# EAGLE board Board (EAGLE 9.0.0)
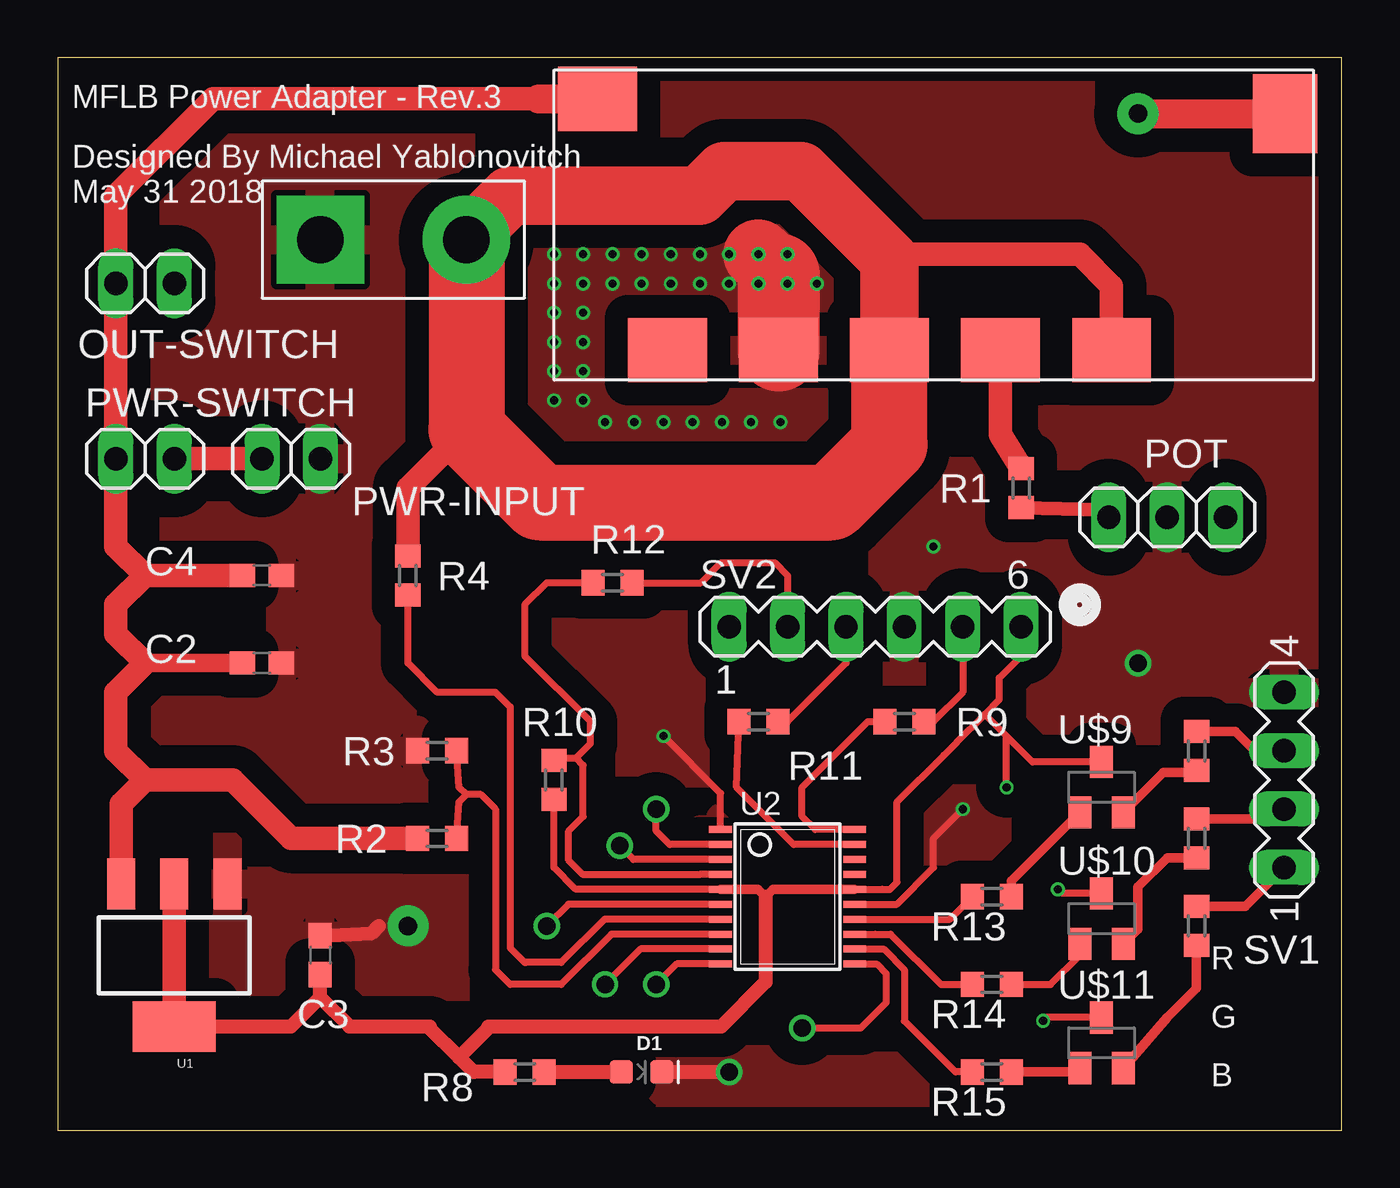
[diagram p0: board, top side]
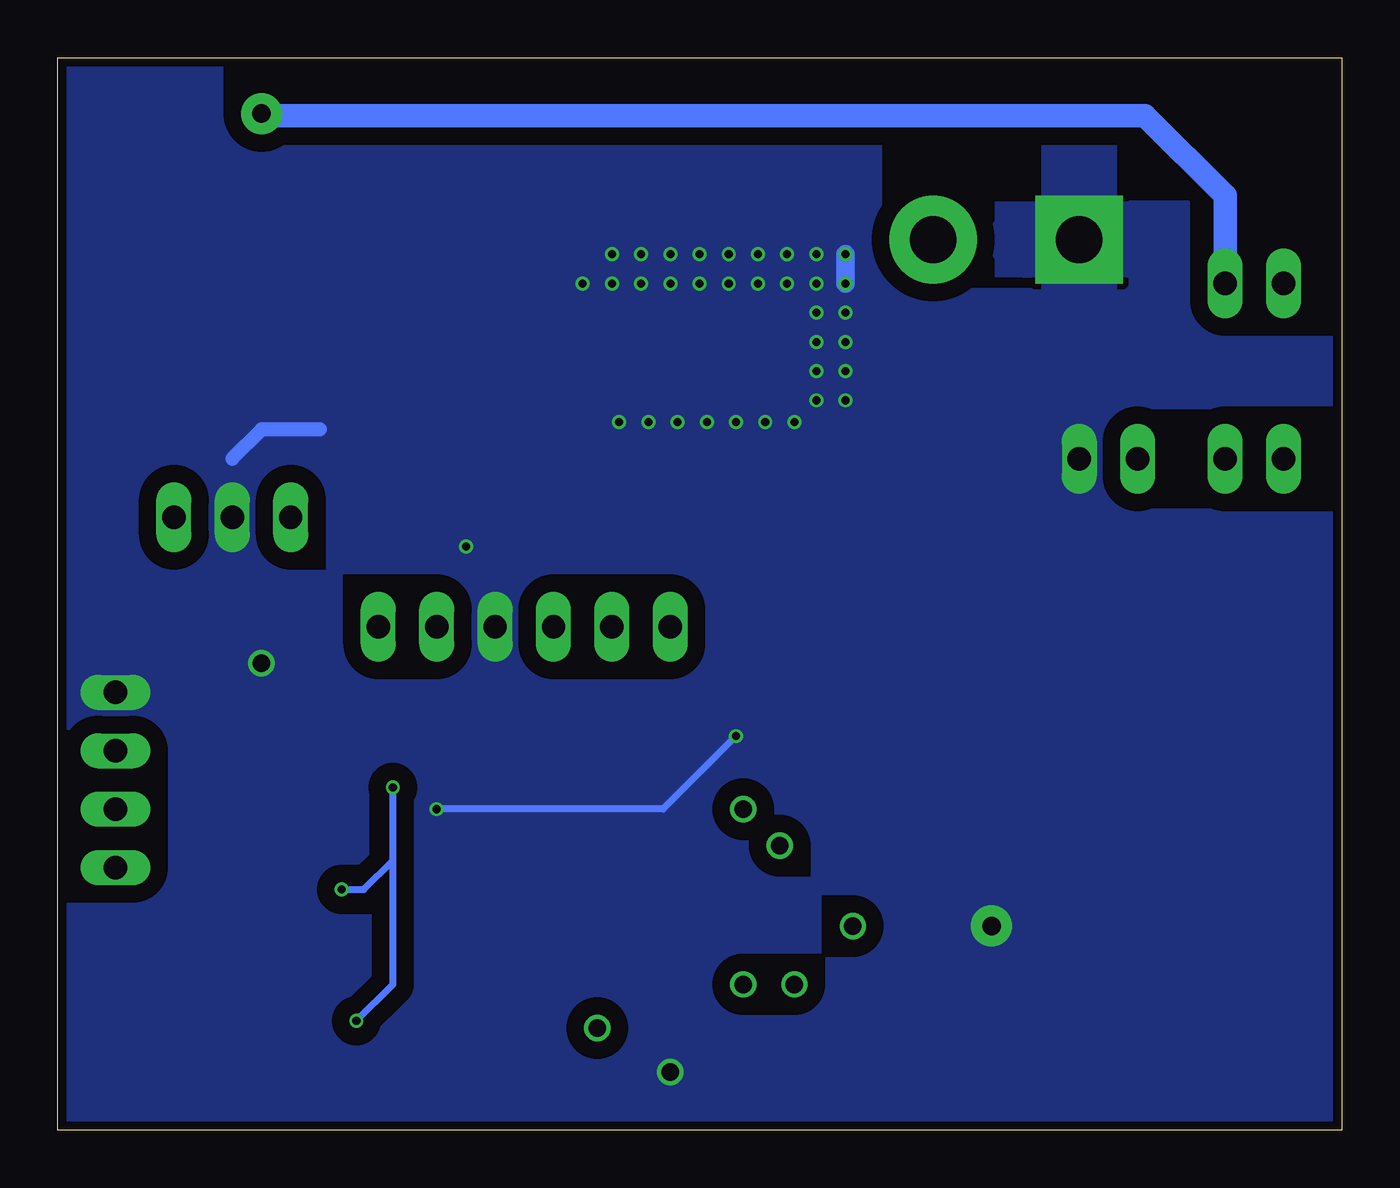
[diagram p1: board, bottom side, seen from below]

Size 55.86 x 46.66 mm. Coordinates in mm from the lower left corner, seen from the top.
Outline: 0,0 55.86,0 55.86,46.66 0,46.66 0,0
Copper layers (1*16): Top 0.035559375mm / dielectric 1.6mm / Bottom 0.035559375mm
Design rules "oshpark-2layer": minimum track width 6mil, minimum drill 10mil, track to track 6mil, track to pad 6mil, pad to pad 6mil, via to via 6mil, smd to smd 6mil, copper to edge 15mil, drill to drill 6mil, minimum pad ring 5mil, minimum via ring 5mil, stop-mask expansion 2.5mil, vias tented up to drill 0mil, thermal gap 10mil
Net classes: 0 default: width 0.254 mm, drill 0.254 mm, clearance 0.762 mm

## Footprints (pad centres in the part's own frame; a part is rotated, then mirrored left to right if it is on the bottom)
C0603 = smd 1.1 x 1: 1 -0.85,0; 2 0.85,0
LED-0603 = smd 1 x 1: A -0.877,0; C 0.877,0
OKY-T/16-D12N-C = smd 2.79 x 3.43: PIN1 15.28,4.85 | smd 3.43 x 2.79: PIN2 -14.62,5.49; PIN3 -11.57,-5.44; PIN4 -6.74,-5.44; PIN5 -1.92,-5.44; PIN6 2.91,-5.44; PIN7 7.74,-5.44
1X02 = drill 1.016 long: 1 -1.27,0; 2 1.27,0
1X03 = drill 1.016 long: 1 -2.54,0; 2 0,0; 3 2.54,0
POWER = drill 2.032 pad 3.81 square: GND 2.54,0 | drill 2.032 pad 3.81: VOUT -3.81,0
R0603 = smd 1 x 1.1: 1 -0.85,0; 2 0.85,0
MA04-1 = drill 1.016 long: 1 -3.81,0; 2 -1.27,0; 3 1.27,0; 4 3.81,0
MA06-1 = drill 1.016 long: 1 -6.35,0; 2 -3.81,0; 3 -1.27,0; 4 1.27,0; 5 3.81,0; 6 6.35,0
SOT223 = smd 1.219 x 2.235: 1 -2.311,-3.099; 2 0,-3.099; 3 2.311,-3.099 | smd 3.6 x 2.2: 4 0,3.099
TSSOP20 = smd 0.305 x 0.991: 1 -2.925,-2.918; 2 -2.275,-2.918; 3 -1.625,-2.918; 4 -0.975,-2.918; 5 -0.325,-2.918; 6 0.325,-2.918; 7 0.975,-2.918; 8 1.625,-2.918; 9 2.275,-2.918; 10 2.925,-2.918; 11 2.925,2.918; 12 2.275,2.918; 13 1.625,2.918; 14 0.975,2.918; 15 0.325,2.918; 16 -0.325,2.918; 17 -0.975,2.918; 18 -1.625,2.918; 19 -2.275,2.918; 20 -2.925,2.918
SOT23 = smd 1 x 1.4: B -0.95,-1.1; C 0.95,-1.1; E 0,1.1

## Placement (x,y rotation side)
C2  47uF  [C0603]  8.89,20.32 0 top
C3  10uF  [C0603]  11.43,7.62 90 top
C4  22uF  [C0603]  8.89,24.13 0 top
D1  BLUE  [LED-0603]  25.4,2.54 0 top
OKY-T/16-D12N-C  OKY-T/16-D12N-C  [OKY-T/16-D12N-C]  38.1,39.37 0 top
OUT-SWITCH  [1X02]  3.81,36.83 0 top
POT  100k  [1X03]  48.26,26.67 0 top
POWER  POWER  [POWER]  13.97,38.73 180 top
PWR-INPUT  [1X02]  10.16,29.21 180 top
PWR-SWITCH  [1X02]  3.81,29.21 0 top
R1  9.1k  [R0603]  41.91,27.94 90 top
R2  7.5k  [R0603]  16.51,12.7 0 top
R3  2.5k  [R0603]  16.51,16.51 0 top
R4  1k  [R0603]  15.24,24.13 270 top
R5  250  [R0603]  49.53,16.51 90 top
R6  200  [R0603]  49.53,12.7 90 top
R7  200  [R0603]  49.53,8.89 90 top
R8  180r  [R0603]  20.32,2.54 180 top
R9  250r  [R0603]  36.83,17.78 0 top
R10  3k3  [R0603]  21.59,15.24 90 top
R11  250r  [R0603]  30.48,17.78 0 top
R12  250r  [R0603]  24.13,23.81 0 top
R13  250  [R0603]  40.64,10.16 180 top
R14  250  [R0603]  40.64,6.35 180 top
R15  250  [R0603]  40.64,2.54 180 top
SV1  [MA04-1]  53.34,15.24 90 top
SV2  [MA06-1]  35.56,21.91 0 top
U1  [SOT223]  5.08,7.62 180 top
U2  STM32F07  [TSSOP20]  31.75,10.16 270 top
U$9  P-MOS-FET  [SOT23]  45.4,14.92 0 top
U$10  P-MOS-FET  [SOT23]  45.4,9.21 0 top
U$11  P-MOS-FET  [SOT23]  45.4,3.81 0 top

## Library data of the parts
C2-C4 = rcl; SPICEPREFIX: C
D1 = SparkFun-LED; PROD_ID: DIO-08575
OKY-T/16-D12N-C POWER U2 = chip
OUT-SWITCH POT PWR-INPUT PWR-SWITCH = pinhead
R1-R15 = rcl; SPICEPREFIX: R
SV1 SV2 = con-lstb; OC_FARNELL: unknown; OC_NEWARK: unknown
U1 = SparkFun-IC-Power; PROD_ID: VREG-08170
U$9-U$11 = YabzLib

## Nets
+3V3: C3.1 R8.2 R10.1 SV2.6 U1.2 U1.4 U2.5 U2.16 U$9.E U$10.E U$11.E
GND: C2.2 C3.2 C4.2 D1.C OKY-T/16-D12N-C.PIN4 POT.2 POWER.GND PWR-INPUT.1 R3.1 SV1.4 SV2.4 U1.1 U2.1 U2.15
LED-B: R15.2 U2.12
LED-G: R14.2 U2.13
LED-R: R13.2 U2.14
N$1: OKY-T/16-D12N-C.PIN1 OUT-SWITCH.2
N$2: R5.2 SV1.3
N$3: POT.1 R1.1
N$4: OKY-T/16-D12N-C.PIN6 R1.2
N$5: R6.2 SV1.2
N$6: R7.2 SV1.1
N$7: R13.1 U$9.B
N$8: R14.1 U$10.B
N$9: R4.2 U2.7
N$10: D1.A R8.1
N$11: R15.1 U$11.B
N$12: R5.1 U$9.C
N$13: R6.1 U$10.C
N$14: R2.2 R3.2 U2.8
N$15: R7.1 U$11.C
N$19: R9.2 SV2.5
N$21: R11.2 SV2.3
N$22: R12.2 SV2.2
NRST: R10.2 R12.1 U2.4
OSCIN: U2.2
OSCOUT: U2.3
PA0: U2.6
PA3: U2.9
PA4: U2.10
PA5: U2.11
PA9: U2.17
PA10: U2.18
SWCLK: R9.1 U2.20
SWDIO: R11.1 U2.19
SWO: SV2.1
VBAT: PWR-INPUT.2 PWR-SWITCH.2
VIN: C2.1 C4.1 OKY-T/16-D12N-C.PIN2 OUT-SWITCH.1 PWR-SWITCH.1 R2.1 U1.3
VOUT: OKY-T/16-D12N-C.PIN5 OKY-T/16-D12N-C.PIN7 POWER.VOUT R4.1

## Tracks (layer width: path | path; a pad name or v marks a point on that pad's centre or on a via)
+3V3  (via drill 0.35)
  Top 0.305: R10.1 21.59,11.43 22.54,10.48 U2.5 | U2.16 35.87,10.48 35.88,10.48 36.2,10.48 36.51,10.79 36.51,14.29 38.54,16.32 38.56,16.32 39.09,16.85 39.09,16.87 40.32,18.1 | SV2.6 41.91,20.64 40.96,19.68 40.96,18.73 40.32,18.1 | U$10.E 43.67,10.31 v43.5,10.48 | U$11.E 43.01,4.91 v42.86,4.76 | U$9.E 42.4,16.02 41.27,17.14 | 41.27,17.14 40.32,18.1 | v41.27,14.92 41.27,17.14
  Top 0.406: U2.16 31.12,10.48 30.8,10.16 30.47,10.48 U2.5
  Top 0.61: U1.4 10.16,4.52 11.43,5.79 | 30.8,10.16 30.8,6.45 28.86,4.52 18.73,4.52 18.73,4.45 17.46,3.17 | 11.43,5.79 C3.1 | 11.43,5.79 12.7,4.52 16.19,4.52 16.19,4.45 17.46,3.17 | 17.46,3.17 18.1,2.54 R8.2
  Top 1.016: U1.4 U1.2
  Bottom 0.305: v42.86,4.76 41.27,6.35 41.27,11.75 | 41.27,11.75 v41.27,14.92 | v43.5,10.48 42.55,10.48 41.27,11.75
GND  (via drill 0.35, 0.76, 0.81 pad 1.78)
  Top 0.305: U2.1 28.83,14.66 v26.35,17.14 | U2.15 36.51,9.84 38.1,11.43 38.1,12.7 v39.37,13.97
  Top 0.61: C3.2 13.65,8.57 13.97,8.89 | D1.C v29.21,2.54
  Top 3.048: 31.36,37.22 v30.48,38.1 | OKY-T/16-D12N-C.PIN4 31.43,33.86
  Top 3.556: 31.36,37.22 OKY-T/16-D12N-C.PIN4
  Bottom 0.305: v26.35,17.14 29.53,13.97 v39.37,13.97
  Bottom 0.61: 44.45,30.48 46.99,30.48 48.26,29.21
  Bottom 0.813: v21.59,38.1 v21.59,36.83
  other vias: 15.24,8.89 33.02,36.83 31.75,36.83 30.48,36.83 31.75,38.1 29.21,38.1 29.21,36.83 27.94,36.83 27.94,38.1 26.67,38.1 26.67,36.83 25.4,36.83 25.4,38.1 24.13,38.1 24.13,36.83 22.86,38.1 22.86,36.83 21.59,35.56 22.86,35.56 22.86,34.29 21.59,34.29 21.59,33.02 22.86,33.02 22.86,31.75 23.81,30.8 21.59,31.75 25.08,30.8 26.35,30.8 27.62,30.8 28.89,30.8 30.16,30.8 31.43,30.8 46.99,20.32 38.1,25.4
  pour Top (isolate 1.016): -1.27,45.72 57.15,45.72 57.15,-1.27 -1.27,-1.27
  pour Bottom: -1.27,49.53 58.42,49.53 58.42,-2.54 -1.27,-2.54
LED-B
  Top 0.305: R15.2 39.05,2.54 36.83,4.76 36.83,6.99 35.93,7.88 U2.12
LED-G
  Top 0.305: U2.13 35.56,8.54 36.23,8.54 38.42,6.35 R14.2
LED-R
  Top 0.305: R13.2 38.81,9.19 U2.14
N$1  (via drill 0.81 pad 1.78)
  Top 1.27: v46.99,44.22 OKY-T/16-D12N-C.PIN1
  Bottom 1.016: v46.99,44.22 46.99,44.13 8.57,44.13 5.08,40.64 OUT-SWITCH.2
N$2
  Top 0.406: R5.2 51.22,17.36 52.07,16.51 SV1.3
N$3
  Top 0.61: R1.1 45.4,26.99 POT.1
  Top 1.016: POT.1 45.57,26.52
N$4
  Top 1.016: OKY-T/16-D12N-C.PIN6 41.01,30.26 R1.2
N$5
  Top 0.406: 52.07,13.97 SV1.2 52.92,13.55 R6.2
N$6
  Top 0.406: R7.2 51.65,9.74 SV1.1
N$7
  Top 0.406: R13.1 41.49,10.86 U$9.B
N$8
  Top 0.305: R14.1 43.18,6.35 44.45,7.62
  Top 0.406: 44.45,7.62 U$10.B
N$9
  Top 0.305: R4.2 15.24,20.32 16.51,19.05 19.05,19.05 19.68,18.41 19.68,7.94 20.32,7.3 20.36,7.3 21.91,7.3 23.79,9.19 U2.7
N$10
  Top 0.61: R8.1 D1.A
N$11
  Top 0.406: U$11.B 44.28,2.54 R15.1
N$12
  Top 0.406: R5.1 49.43,15.56 48.09,15.56 U$9.C
N$13
  Top 0.406: R6.1 48.26,11.85 46.99,10.58 46.99,8.74 U$10.C
N$14
  Top 0.305: R2.2 17.46,14.29 17.78,14.61 | R3.2 17.46,14.93 17.78,14.61 | 17.78,14.61 18.41,14.61 19.05,13.97 19.05,6.99 19.68,6.35 21.91,6.35 24.09,8.54 U2.8
N$15
  Top 0.406: U$11.C 48.26,4.91 49.53,6.18 R7.1
N$19
  Top 0.305: SV2.5 39.37,19.05 38.1,17.78 R9.2
N$21
  Top 0.305: SV2.3 34.29,20.32 31.75,17.78 R11.2
N$22
  Top 0.305: SV2.2 31.75,24.13 31.19,24.69 28.86,24.69 27.98,23.81 R12.2
NRST
  Top 0.305: 22.54,16.19 22.86,15.88 22.86,13.65 22.23,13.02 22.23,11.75 22.86,11.11 27.94,11.11 27.96,11.13 U2.4 | 22.54,16.19 23.18,16.83 23.18,17.78 20.32,20.64 20.32,22.86 21.27,23.81 R12.1 | R10.2 21.69,16.19 22.54,16.19
OSCIN  (via drill 0.76)
  Top 0.305: U2.2 26.62,12.44 26.04,13.02 v26.04,13.97
OSCOUT  (via drill 0.76)
  Top 0.305: U2.3 25.05,11.79 v24.45,12.38
PA0  (via drill 0.76)
  Top 0.305: U2.6 26.67,9.84 | 26.67,9.84 26.36,9.84 22.22,9.84 v21.27,8.89 | 26.67,9.84 26.66,9.84
PA3  (via drill 0.76)
  Top 0.305: v23.81,6.35 25.35,7.88 U2.9
PA4  (via drill 0.76)
  Top 0.305: 28.51,7.24 U2.10 26.92,7.24 v26.04,6.35
PA5  (via drill 0.76)
  Top 0.305: U2.11 35.63,7.24 36.04,6.83 36.04,5.56 34.92,4.45 v32.38,4.45
SWCLK
  Top 0.305: U2.20 32.95,13.09 32.38,13.65 32.38,14.92 35.24,17.78 R9.1
SWDIO
  Top 0.305: 34.55,12.44 U2.19 32.02,12.44 29.53,14.92 R11.1
VBAT
  Top 1.016: PWR-SWITCH.2 PWR-INPUT.2
VIN
  Top 0.813: C2.1 3.81,20.32
  Top 1.016: 3.81,24.13 2.54,25.4 PWR-SWITCH.1 OUT-SWITCH.1 2.54,40.64 6.76,44.86 21.59,44.86 | 3.81,24.13 2.54,22.86 2.54,21.59 3.81,20.32 2.54,19.05 2.54,16.51 3.81,15.24 | 3.81,24.13 C4.1 | 3.81,15.24 2.77,14.2 U1.3 | 3.81,15.24 7.62,15.24 10.16,12.7 R2.1
  Top 1.27: 20.94,44.86 21.59,44.86 OKY-T/16-D12N-C.PIN2
VOUT
  Top 0.305: 36.18,37.86 35.94,38.1 35.56,38.1
  Top 0.406: R4.1 15.24,25.1
  Top 0.813: 33.02,26.67 33.66,27.3
  Top 1.016: OKY-T/16-D12N-C.PIN7 45.84,36.71 44.45,38.1 35.56,38.1 | 17.78,30.48 15.24,27.94 15.24,25.1
  Top 2.54: POWER.VOUT 19.68,40.64 27.92,40.64 28.99,41.71 32.33,41.71 36.18,37.86 OKY-T/16-D12N-C.PIN5
  Top 3.302: OKY-T/16-D12N-C.PIN5 36.18,29.83 33.66,27.3 20.95,27.3 17.78,30.48 POWER.VOUT

## Text on the board
tPlace: MFLB Power Adapter - Rev.3 | Designed By Michael Yablonovitch / May 31 2018 | R | G | B